# Altium PCB piccolaPCB.PcbDoc
Units mil, origin at the board's own origin, x right, y up, seen from the top; angles counter-clockwise.
Board outline 3149.61 x 3149.61 mil, 2 copper layers (Top Layer, Bottom Layer); 20 components, 48 nets, 176 pads, 8 vias.
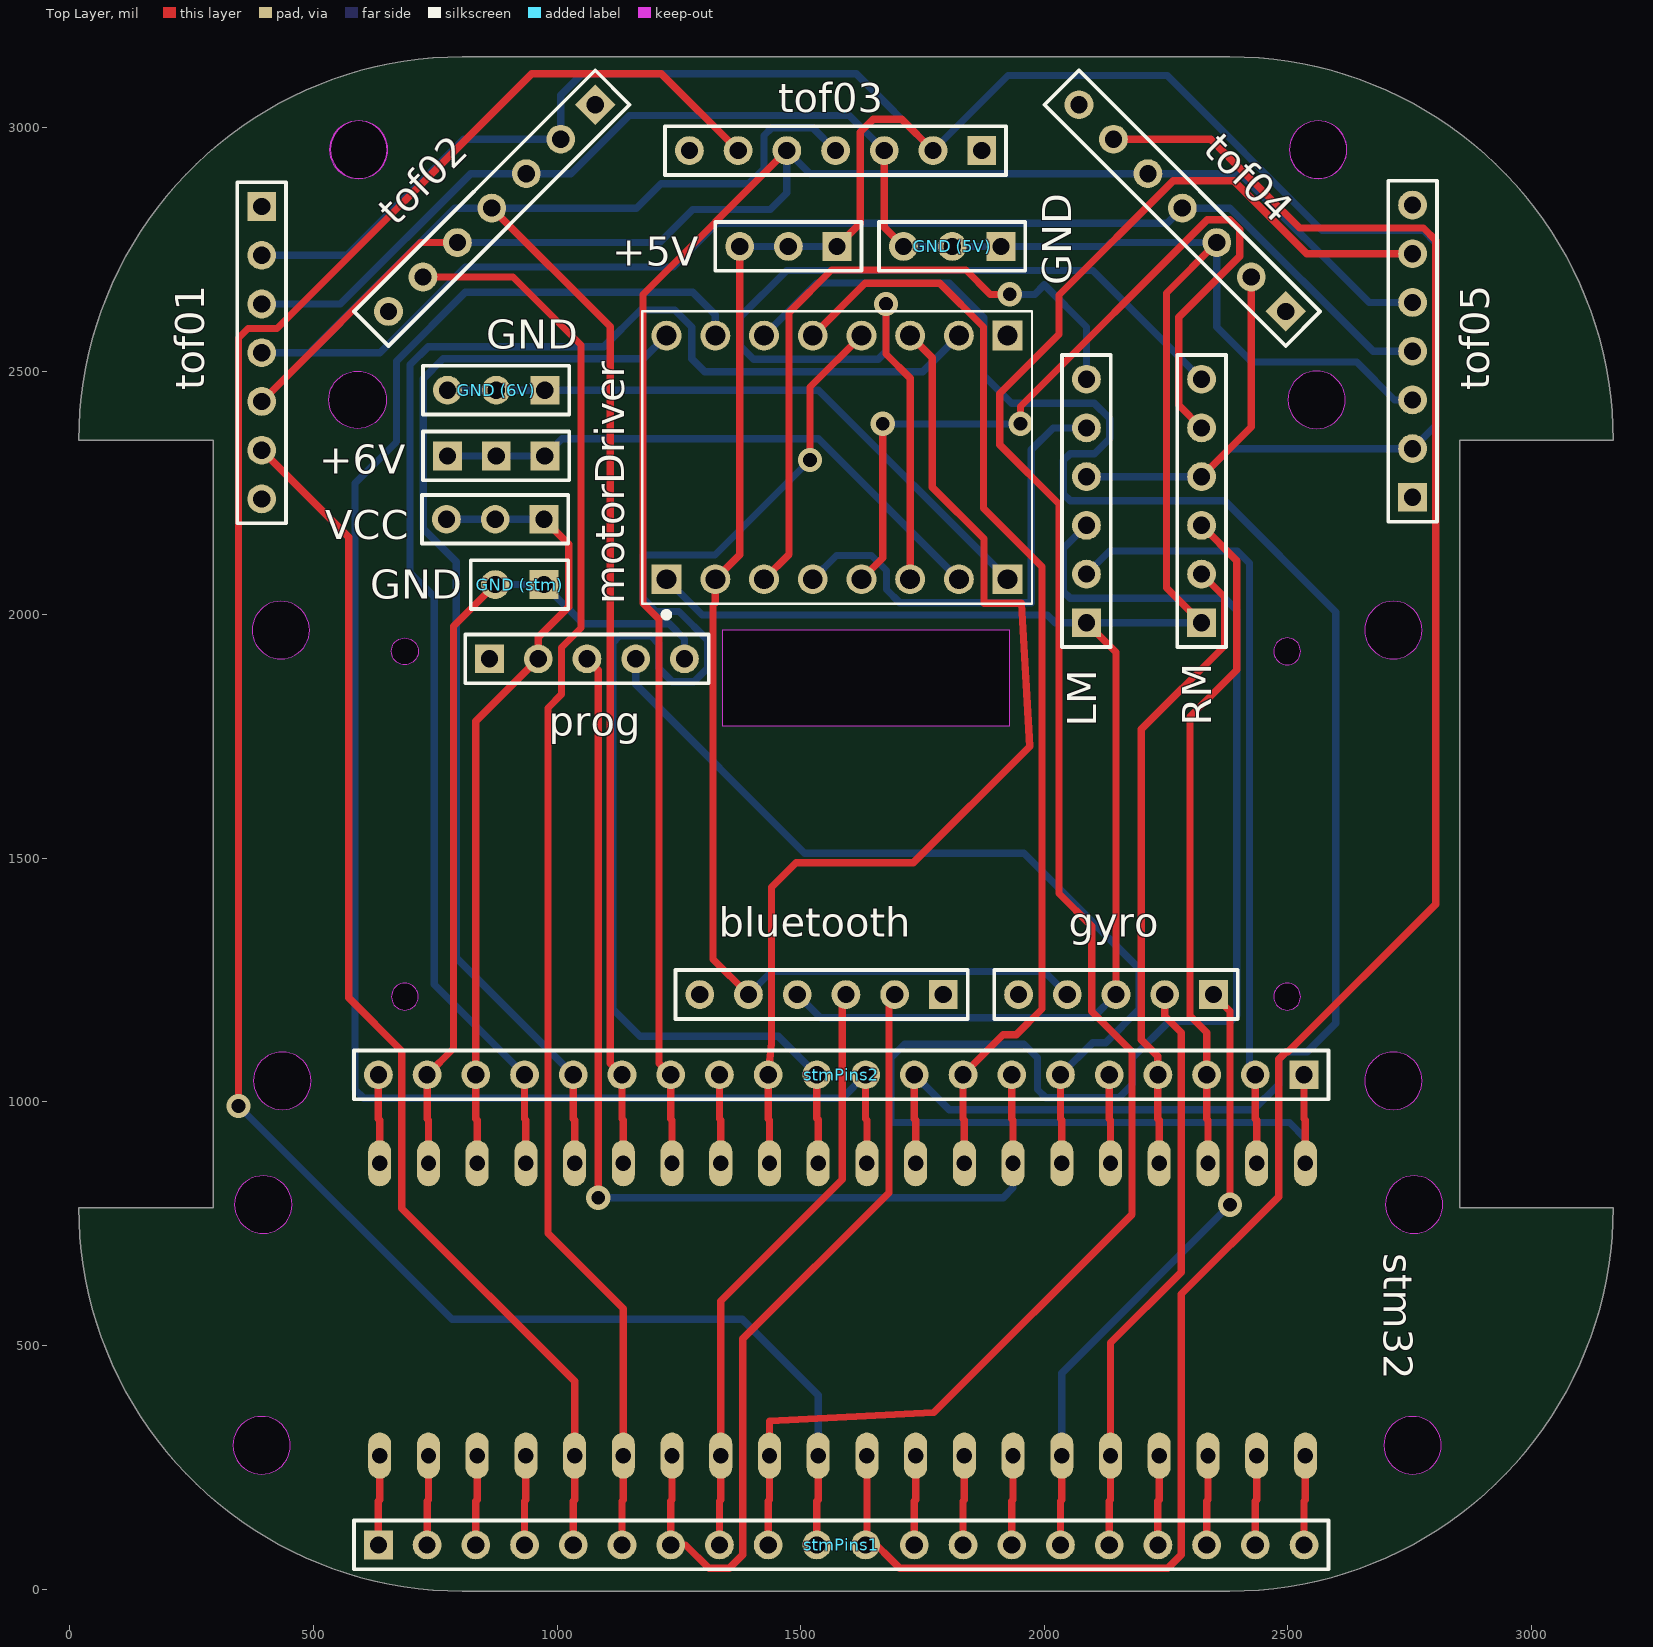
[diagram p0: Top Layer view]
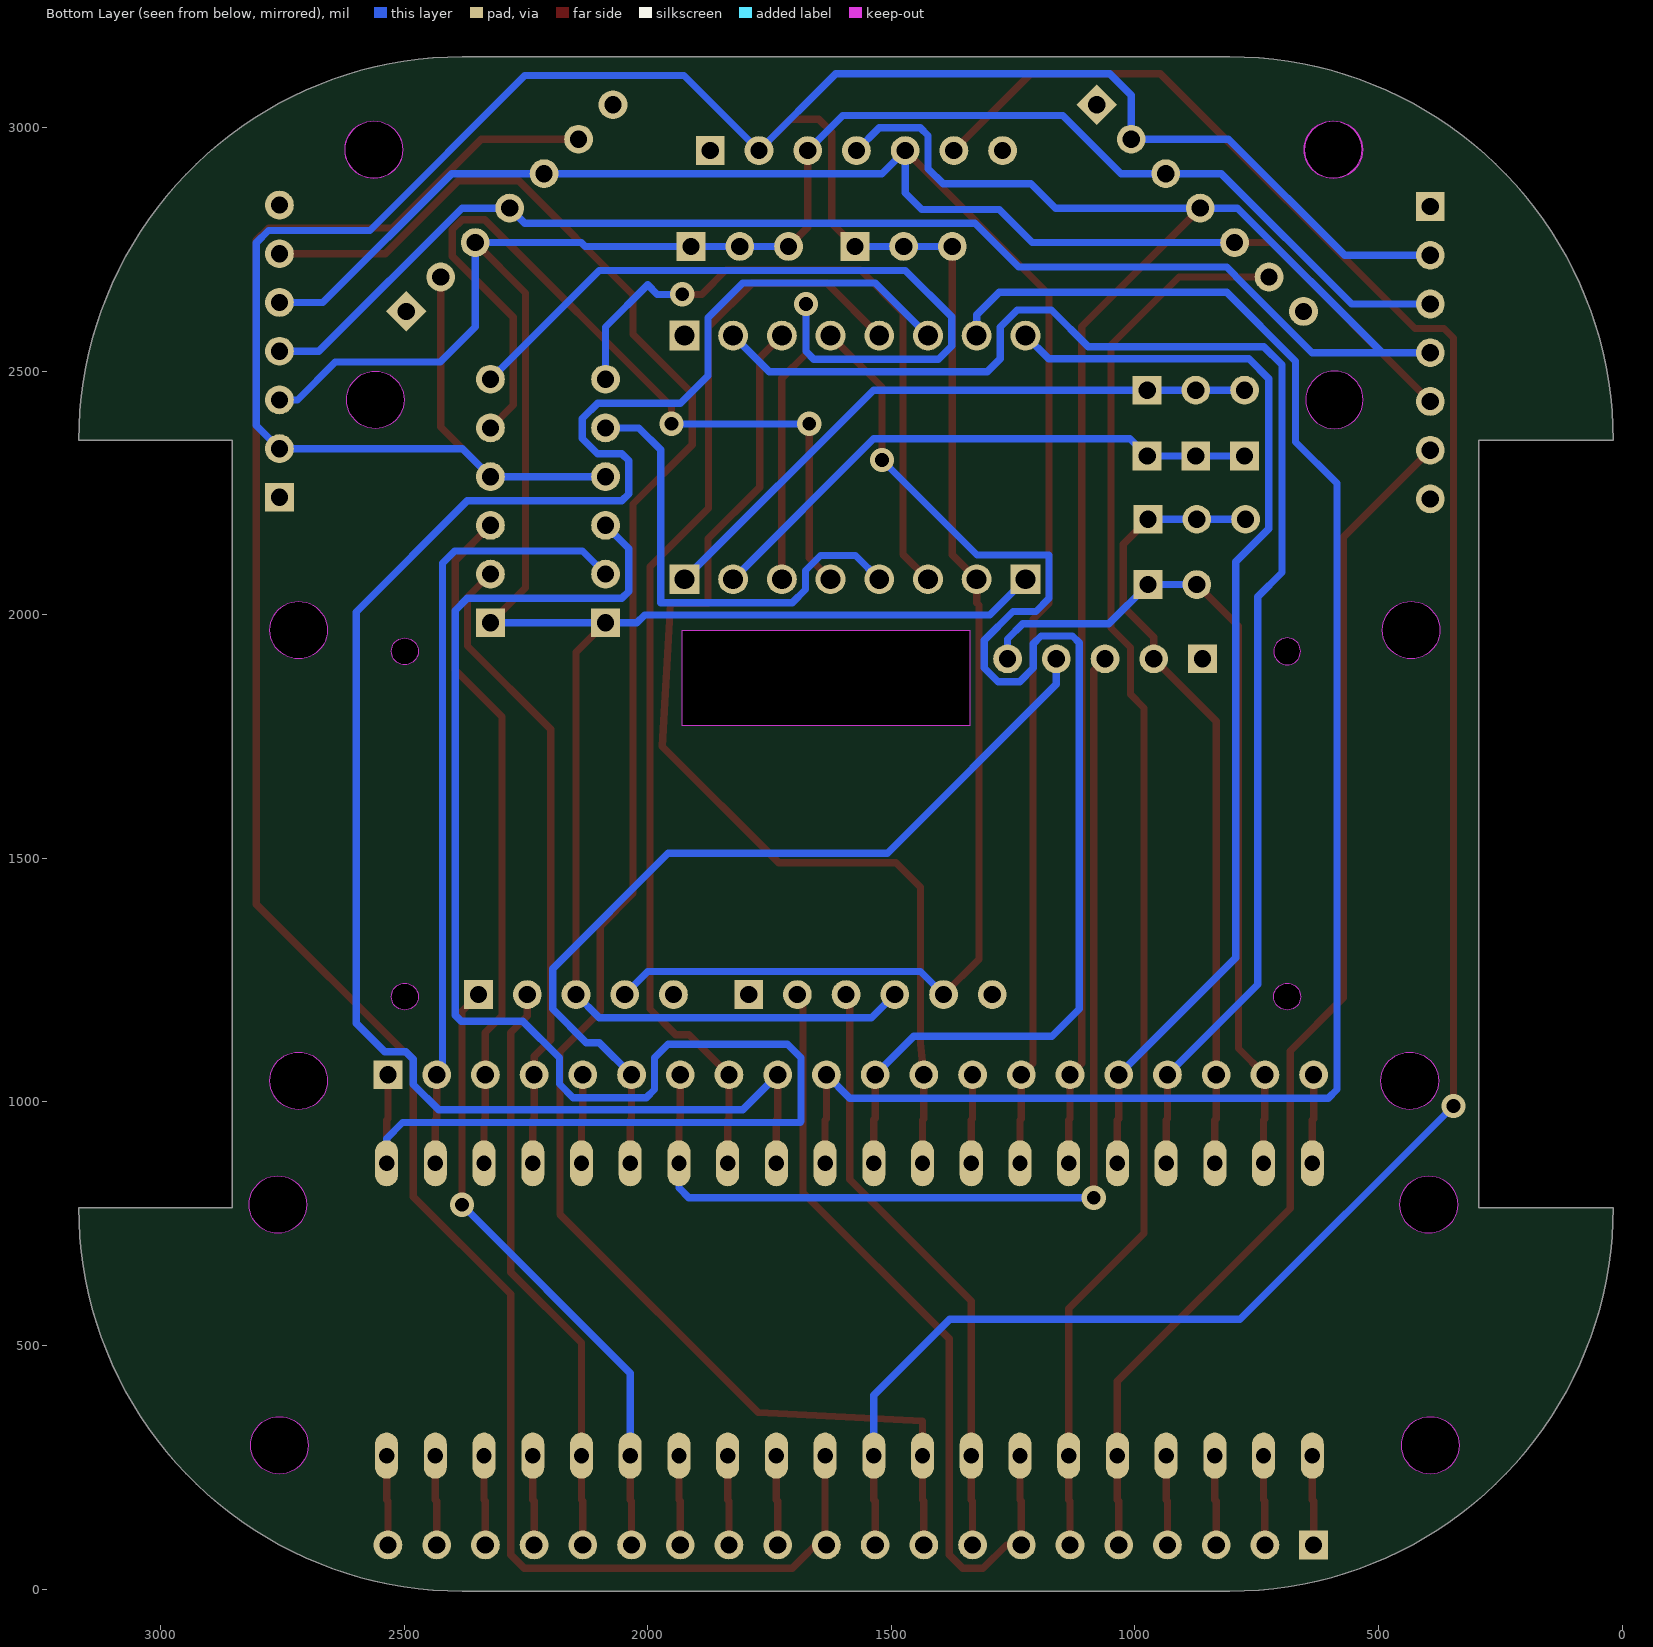
[diagram p1: Bottom Layer view, seen from below]

## Layer stack, top to bottom
Top Solder: solder mask 0.4, Solder Resist, Dk 3.5
Top Layer: signal copper 1.4
Dielectric 1: dielectric 12.6, FR-4, Dk 4.8
Bottom Layer: signal copper 1.4
Bottom Solder: solder mask 0.4, Solder Resist, Dk 3.5

## Board outline
18.27,783.07 293.86,783.07 293.86,2357.87 18.27,2357.87 cw(c805.67,2357.87) 805.67,3145.28 2380.47,3145.28 cw(c2380.47,2357.87) 3167.87,2357.87 2852.91,2357.87 2852.91,783.07 3167.87,783.07 cw(c2380.47,783.07) 2380.47,-4.33 805.67,-4.33 cw(c805.67,783.07)
cut-out: 1929.13,1968.5 1338.58,1968.5 1338.58,1771.65 1929.13,1771.65
cut-out: 660,1216.14 ccw(c687.56,1216.14) 687.56,1188.58 ccw(c687.56,1216.14) 715.12,1216.14 ccw(c687.56,1216.14) 687.56,1243.7 ccw(c687.56,1216.14)
cut-out: 2471.02,1216.14 ccw(c2498.58,1216.14) 2498.58,1188.58 ccw(c2498.58,1216.14) 2526.14,1216.14 ccw(c2498.58,1216.14) 2498.58,1243.7 ccw(c2498.58,1216.14)
cut-out: 2471.02,1924.8 ccw(c2498.58,1924.8) 2498.58,1897.24 ccw(c2498.58,1924.8) 2526.14,1924.8 ccw(c2498.58,1924.8) 2498.58,1952.36 ccw(c2498.58,1924.8)
cut-out: 687.56,1897.24 cw(c687.56,1924.8) 660,1924.8 cw(c687.56,1924.8) 687.56,1952.36 cw(c687.56,1924.8) 715.12,1924.8 cw(c687.56,1924.8)
cut-out: 590.55,2381.89 cw(c590.55,2440.94) 531.5,2440.94 cw(c590.55,2440.94) 590.55,2500 cw(c590.55,2440.94) 649.61,2440.94 cw(c590.55,2440.94)
cut-out: 396.97,730.32 ccw(c396.97,789.37) 456.02,789.37 ccw(c396.97,789.37) 396.97,848.43 ccw(c396.97,789.37) 337.91,789.37 ccw(c396.97,789.37)
cut-out: 2500,2440.94 ccw(c2559.06,2440.94) 2559.06,2381.89 ccw(c2559.06,2440.94) 2618.11,2440.94 ccw(c2559.06,2440.94) 2559.06,2500 ccw(c2559.06,2440.94)
cut-out: 2700.12,789.37 ccw(c2759.17,789.37) 2759.17,730.32 ccw(c2759.17,789.37) 2818.23,789.37 ccw(c2759.17,789.37) 2759.17,848.43 ccw(c2759.17,789.37)
cut-out: 534.76,2954.72 ccw(c593.82,2954.72) 593.82,2895.67 ccw(c593.82,2954.72) 652.87,2954.72 ccw(c593.82,2954.72) 593.82,3013.78 ccw(c593.82,2954.72)
cut-out: 2503.27,2954.72 ccw(c2562.32,2954.72) 2562.32,2895.67 ccw(c2562.32,2954.72) 2621.38,2954.72 ccw(c2562.32,2954.72) 2562.32,3013.78 ccw(c2562.32,2954.72)
cut-out: 435.98,984.25 ccw(c435.98,1043.31) 495.03,1043.31 ccw(c435.98,1043.31) 435.98,1102.36 ccw(c435.98,1043.31) 376.92,1043.31 ccw(c435.98,1043.31)
cut-out: 2716.54,984.25 ccw(c2716.54,1043.31) 2775.59,1043.31 ccw(c2716.54,1043.31) 2716.54,1102.36 ccw(c2716.54,1043.31) 2657.48,1043.31 ccw(c2716.54,1043.31)
cut-out: 2561.97,2895.32 ccw(c2561.97,2954.37) 2621.02,2954.37 ccw(c2561.97,2954.37) 2561.97,3013.43 ccw(c2561.97,2954.37) 2502.91,2954.37 ccw(c2561.97,2954.37)
cut-out: 591.97,2895.32 ccw(c591.97,2954.37) 651.02,2954.37 ccw(c591.97,2954.37) 591.97,3013.43 ccw(c591.97,2954.37) 532.91,2954.37 ccw(c591.97,2954.37)
cut-out: 2696.85,295.28 ccw(c2755.91,295.28) 2755.91,236.22 ccw(c2755.91,295.28) 2814.96,295.28 ccw(c2755.91,295.28) 2755.91,354.33 ccw(c2755.91,295.28)
cut-out: 334.65,295.28 ccw(c393.7,295.28) 393.7,236.22 ccw(c393.7,295.28) 452.76,295.28 ccw(c393.7,295.28) 393.7,354.33 ccw(c393.7,295.28)
cut-out: 2657.48,1968.5 ccw(c2716.54,1968.5) 2716.54,1909.45 ccw(c2716.54,1968.5) 2775.59,1968.5 ccw(c2716.54,1968.5) 2716.54,2027.56 ccw(c2716.54,1968.5)
cut-out: 374.02,1968.5 ccw(c433.07,1968.5) 433.07,1909.45 ccw(c433.07,1968.5) 492.13,1968.5 ccw(c433.07,1968.5) 433.07,2027.56 ccw(c433.07,1968.5)

## Design rules (kind name [scope] priority, off if disabled: settings)
Clearance [All] p1: gap=10 ignorepadtopadclearanceinfootprint=FALSE except(0: Arc-Hole Track-Hole SMDPad-Hole THPad-Hole Via-Hole Fill-Hole Poly-Hole Region-Hole Text-Hole)
PolygonConnect [All] p1: connectstyle=Relief reliefconductorwidth=10 reliefentries=4 polygonreliefangle="90 Angle" airgapwidth=10
RoutingVias [All] p1: holewidth=28 width=50 viastyle="Through Hole" minholewidth=28 minwidth=50 maxholewidth=28 maxwidth=50
SolderMaskExpansion [All] p1: expansion=4
Width [All] p1: maxlimit=30 minlimit=15 preferedwidth=15
30 further rules are at their usual default settings.

## Components (designator, comment, footprint, x,y, rotation, side; value= is the part's Value field where it differs from the comment)
+5V "Header 3" HDR1X3#1 1574.8,2755.91 r180 top
+6V "Header 3" HDR1X3#2 975,2326 r180 top
bluetooth "Header 6" HDR1X6 1792.91,1220.47 r180 top
"GND (5V)" "Header 3" HDR1X3#1 1911.02,2755.91 r180 top
"GND (6V)" "Header 3" HDR1X3#1 975,2461 r180 top
"GND (stm)" "Header 2" HDR1X2 973,2062 r180 top
gyro "Header 5" HDR1X5 2347.24,1220.47 r180 top
LM "Header 6" HDR1X6 2086.62,1983.46 r90 top
motorDriver "POLOLU-713" *SHIELD_POLOLU-713 1574.8,2322.83 r90 top
prog "Header 5" HDR1X5 861.42,1909.45 r0 top
RM "Header 6" HDR1X6 2322.84,1983.46 r90 top
stm32 "" BLUE_PILL 1936,574 r270 top
stmPins1 "Header 20" HDR1X20 633.27,90.67 r0 top
stmPins2 "Header 20" HDR1X20 2533.27,1055.67 r180 top
tof01 "Header 7" HDR1X7 393.7,2837.8 r270 top
tof02 "Header 7" HDR1X7 1078.27,3046.78 r225 top
tof03 "Header 7" HDR1X7 1871.65,2952.76 r180 top
tof04 "Header 7" HDR1X7 2495.6,2622.51 r135 top
tof05 "Header 7" HDR1X7 2755.91,2240.94 r90 top
VCC "Header 3" HDR1X3#1 973,2196 r180 top

## Footprints (in the part's own frame and the unit in brackets; to place one, negate y for a bottom-side part, rotate by r counter-clockwise, add the part's x,y. Pads: shape width x height; smd on the part's side, far side on the other; paste and mask are expansions set on the pad)
*SHIELD_POLOLU-713 [mm]
  rect 1.56x1.56 hole 1.04: 1(-6.35,8.89) 8(-6.35,-8.89) 9(6.35,-8.89)
  round 1.56 hole 1.04: 2(-6.35,6.35) 3(-6.35,3.81) 4(-6.35,1.27) 5(-6.35,-1.27) 6(-6.35,-3.81) 7(-6.35,-6.35) 10(6.35,-6.35) 11(6.35,-3.81) 12(6.35,-1.27) 13(6.35,1.27) 14(6.35,3.81) 15(6.35,6.35) 16(6.35,8.89)
  silkscreen extent -8.35,-10.16 7.62,10.16
BLUE_PILL [mil]
  oval 94.5x47.25 hole 31.5: P$1(-300,600) P$2(-300,500) P$3(-300,400) P$4(-300,300) P$5(-300,200) P$6(-300,100) P$7(-300,0) P$8(-300,-100) P$9(-300,-200) P$10(-300,-300) P$11(-300,-400) P$12(-300,-500) P$13(-300,-600) P$14(-300,-700) P$15(-300,-800) P$16(-300,-900) P$17(-300,-1000) P$18(-300,-1100) P$19(-300,-1200) P$20(-300,-1300) P$21(300,600) P$22(300,500) P$23(300,400) P$24(300,300) P$25(300,200) P$26(300,100) P$27(300,0) P$28(300,-100) P$29(300,-200) P$30(300,-300) P$31(300,-400) P$32(300,-500) P$33(300,-600) P$34(300,-700) P$35(300,-800) P$36(300,-900) P$37(300,-1000) P$38(300,-1100) P$39(300,-1200) P$40(300,-1300)
HDR1X2 [mm] "Connector; Header; 2 Position"
  rect 1.5x1.5 hole 0.9: 1(0,0)
  round 1.5 hole 0.9: 2(2.54,0)
  silkscreen extent -1.27,-1.27 3.81,1.27
HDR1X3#1 [mm] "Connector; Header; 3 Position"
  rect 1.5x1.5 hole 0.9: 1(0,0)
  round 1.5 hole 0.9: 2(2.54,0) 3(5.08,0)
  silkscreen extent -1.27,-1.27 6.35,1.27
HDR1X3#2 [mm] "Connector; Header; 3 Position"
  rect 1.5x1.5 hole 0.9: 1(0,0) 2(2.54,0) 3(5.08,0)
  silkscreen extent -1.27,-1.27 6.35,1.27
HDR1X5 [mm] "Connector; Header; 5 Position"
  rect 1.5x1.5 hole 0.9: 1(0,0)
  round 1.5 hole 0.9: 2(2.54,0) 3(5.08,0) 4(7.62,0) 5(10.16,0)
  silkscreen extent -1.27,-1.27 11.43,1.27
HDR1X6 [mm] "Connector; Header; 6 Position"
  rect 1.5x1.5 hole 0.9: 1(0,0)
  round 1.5 hole 0.9: 2(2.54,0) 3(5.08,0) 4(7.62,0) 5(10.16,0) 6(12.7,0)
  silkscreen extent -1.27,-1.27 13.97,1.27
HDR1X7 [mm] "Connector; Header; 7 Position"
  rect 1.5x1.5 hole 0.9: 1(0,0)
  round 1.5 hole 0.9: 2(2.54,0) 3(5.08,0) 4(7.62,0) 5(10.16,0) 6(12.7,0) 7(15.24,0)
  silkscreen extent -1.27,-1.27 16.51,1.27
HDR1X20 [mm] "Connector; Header; 20 Position"
  rect 1.5x1.5 hole 0.9: 1(0,0)
  round 1.5 hole 0.9: 2(2.54,0) 3(5.08,0) 4(7.62,0) 5(10.16,0) 6(12.7,0) 7(15.24,0) 8(17.78,0) 9(20.32,0) 10(22.86,0) 11(25.4,0) 12(27.94,0) 13(30.48,0) 14(33.02,0) 15(35.56,0) 16(38.1,0) 17(40.64,0) 18(43.18,0) 19(45.72,0) 20(48.26,0)
  silkscreen extent -1.27,-1.27 49.53,1.27

## Part data
+5V +6V "GND (5V)" "GND (6V)" VCC: "Header, 3-Pin", LatestRevisionDate=17-Jul-2002, LatestRevisionNote="Re-released for DXP Platform.", Publisher="Altium Limited"
bluetooth LM RM: "Header, 6-Pin", LatestRevisionDate=17-Jul-2002, LatestRevisionNote="Re-released for DXP Platform.", Publisher="Altium Limited"
"GND (stm)": "Header, 2-Pin", LatestRevisionDate=17-Jul-2002, LatestRevisionNote="Re-released for DXP Platform.", Publisher="Altium Limited"
gyro prog: "Header, 5-Pin", LatestRevisionDate=17-Jul-2002, LatestRevisionNote="Re-released for DXP Platform.", Publisher="Altium Limited"
motorDriver: "DC-motor driver; IC: TB6612FNG; 100kHz; 1A; Uin mot: 4.5", Package=None, Availability=Unavailable, MF=Pololu, MP=POLOLU-713, Price=None, SnapEDA_Link=https://www.snapeda.com/parts/POLOLU-713/Pololu/view-part/?ref=snap
stm32: library part BLUE_PILL
stmPins1 stmPins2: "Header, 20-Pin", LatestRevisionDate=17-Jul-2002, LatestRevisionNote="Re-released for DXP Platform.", Publisher="Altium Limited"
tof01 tof02 tof03 tof04 tof05: "Header, 7-Pin", LatestRevisionDate=17-Jul-2002, LatestRevisionNote="Re-released for DXP Platform.", Publisher="Altium Limited"

## Via types
v1: diameter 50, hole 28, Top Layer to Bottom Layer, 8 vias

## Nets (pads, with @x,y where several pads share a name; then routed paths per layer and width w, separated by ;. In a path a pad name is that pad's centre, name@x,y a point inside that pad or via, vN(x,y) a via of type N, cw(c..) or ccw(c..) an arc to the next point about the centre after c; other vN are vias at no path point)
GND: "GND (5V).1" "GND (5V).2" "GND (5V).3" bluetooth.4 gyro.3 LM.1 motorDriver.1 RM.1 tof01.3 tof02.3 tof03.3 tof04.3 tof05.3 | length 6434.9
  Top Layer w15: tof03.3 1671.65,2795.28 1711.02,2755.91 ; LM.1 2147.24,1922.84 gyro.3 ; RM.1 2250.81,2055.49 2250.81,2660.56 tof04.3
  Bottom Layer w15: tof01.3 555.1,2637.8 822.66,2905.36 tof02.3 1028.69,2905.36 1148.11,3024.78 1599.63,3024.78 tof03.3 ; motorDriver.1 1298.01,1999.63 2006.11,1999.63 2022.27,1983.47 LM.1 RM.1 ; bluetooth.4 1540.72,1172.67 2099.44,1172.67 gyro.3 ; 1711.02,2755.91 1811.02,2755.91 1911.02,2755.91 2128.27,2755.91 2136.3,2763.94 tof04.3 2354.18,2590.67 2426.18,2518.67 2641.27,2518.67 2718.99,2440.95 tof05.3
Net+6V_1: +6V.1 +6V.2 +6V.3 motorDriver.7 | length 1183.7
  Bottom Layer w15: +6V.3 +6V.2 +6V.1 1010.02,2361.02 1536.62,2361.02 motorDriver.7
Netbluetooth_2: bluetooth.2 stm32.P$34 stmPins1.7 | length 1642.8
  Top Layer w15: stm32.P$34 1236,183.4 1233.27,180.67 stmPins1.7 1263.77,90.67 1311.77,42.67 1353.27,42.67 1381.27,70.67 1381.27,513.67 1681.27,813.67 1681.27,1208.83 bluetooth.2
Netbluetooth_3: bluetooth.3 stm32.P$33 stmPins1.8 | length 1241.8
  Top Layer w15: stmPins1.8 1333.27,180.67 1336,183.4 stm32.P$33 1336,591.4 1585.27,840.67 1585.27,1220.47 bluetooth.3
"NetGND (6V)_1": "GND (6V).1" "GND (6V).2" "GND (6V).3" motorDriver.8 | length 1310.6
  Bottom Layer w15: 775,2461 875,2461 975,2461 1536.64,2461 motorDriver.8
"NetGND (stm)_1": "GND (stm).1" "GND (stm).2" prog.5 stm32.P$19 stmPins2.19 | length 1722.4
  Top Layer w15: stm32.P$19 736,962.67 733.27,965.4 stmPins2.19 787.4,1109.8 787.4,1976.4 873,2062
  Bottom Layer w15: 873,2062 973,2062 1053.52,1981.48 1230.03,1981.48 1261.42,1950.09 prog.5
Netgyro_1: gyro.1 stm32.P$26 stmPins1.15 | length 1288
  Top Layer w15: stmPins1.15 2033.27,180.67 2036,183.4 stm32.P$26 ; gyro.1 2381.27,1186.45 v1(2381.27,788.67)
  Bottom Layer w15: stm32.P$26 2036,443.4 v1(2381.27,788.67)
Netgyro_2: gyro.2 stm32.P$25 stmPins1.16 | length 1205.2
  Top Layer w15: stmPins1.16 2133.27,180.67 2136,183.4 stm32.P$25 2136,505.4 2281.27,650.67 2281.27,1142.39 2247.24,1176.42 gyro.2
NetLM_2: LM.2 stm32.P$2 stmPins2.2 | length 1602.3
  Top Layer w15: stmPins2.2 2433.27,965.4 2436,962.67 stm32.P$2
  Bottom Layer w15: LM.2 2133.82,2130.67 2396.27,2130.67 2421.26,2105.68 2421.26,1067.68 stmPins2.2
NetLM_3: LM.3 stm32.P$1 stmPins2.1 | length 3495
  Top Layer w15: stmPins2.1 2533.27,965.4 2536,962.67 stm32.P$1
  Bottom Layer w15: LM.3 2039.27,2136.12 2039.27,2047.67 2053.27,2033.67 2370.27,2033.67 2395.27,2008.67 2395.27,1178.17 2382.77,1165.67 2256.27,1165.67 2181.27,1090.67 2181.27,1036.64 2153.27,1008.64 2003.27,1008.64 1986.24,1025.67 1986.24,1090.67 1958.24,1118.67 1713.27,1118.67 1685.27,1090.67 1685.27,959.67 1687.27,957.67 2503.27,957.67 2536,924.94 stm32.P$1
NetLM_5: LM.5 motorDriver.4 | length 977.5
  Bottom Layer w15: motorDriver.4 1573.64,2121.67 1645.27,2121.67 1676.27,2090.67 1676.27,2051.63 1703.27,2024.63 1973.27,2024.63 1973.27,2338.36 2018.37,2383.47 LM.5
NetLM_6: LM.6 motorDriver.3 | length 1387.5
  Top Layer w15: motorDriver.3 1476.27,2124.3 1476.27,2620.67 1563.27,2707.67 1839.27,2707.67 1889.46,2657.47 v1(1929.13,2657.47)
  Bottom Layer w15: v1(1929.13,2657.47) 1980.43,2657.47 2000.12,2677.17 2086.61,2590.67 LM.6
NetmotorDriver_5: motorDriver.5 RM.5 | length 1751.5
  Top Layer w15: motorDriver.5 1668.27,2116.3 v1(1668.27,2391.67) ; v1(1951.27,2391.67) 1951.27,2427.53 2334.7,2810.96 2380.91,2810.96 2401.21,2790.67 2401.21,2736.05 2275.81,2610.65 2275.81,2430.49 RM.5
  Bottom Layer w15: v1(1668.27,2391.67) v1(1951.27,2391.67)
NetmotorDriver_6: motorDriver.6 RM.6 | length 2137.6
  Top Layer w15: v1(1675.27,2637.67) 1675.27,2535.21 1724.8,2485.68 motorDriver.6
  Bottom Layer w15: v1(1675.27,2637.67) 1675.27,2540.67 1659.22,2524.63 1403.27,2524.63 1376.27,2551.63 1376.27,2611.67 1471.27,2706.67 2099.63,2706.67 RM.6
NetmotorDriver_10: motorDriver.10 stm32.P$17 stmPins2.17 | length 3032.1
  Top Layer w15: stmPins2.17 933.27,965.4 936,962.67 stm32.P$17
  Bottom Layer w15: stmPins2.17 748.03,1240.91 748.03,2036.91 698.27,2086.67 698.27,2512.98 735.46,2550.17 1095.77,2550.17 1171.27,2625.67 1241.27,2625.67 1276.27,2590.67 1276.27,2525.67 1303.27,2498.67 1750.64,2498.67 motorDriver.10
NetmotorDriver_11: motorDriver.11 stm32.P$12 stmPins2.12 | length 2201.3
  Top Layer w15: stm32.P$12 1436,962.67 1433.27,965.4 stmPins2.12 1440.27,1120.67 1440.27,1440.67 1490.27,1490.67 1731.27,1490.67 1970.27,1729.67 1953.27,2023.67 1876.27,2023.67 1876.27,2155.67 1770.27,2261.67 1770.27,2527.37 motorDriver.11
NetmotorDriver_12: motorDriver.12 stm32.P$11 stmPins2.11 | length 2727.5
  Top Layer w15: v1(1519.27,2317.67) 1519.27,2467.3 motorDriver.12 ; stmPins2.11 1533.27,966.77 1536,964.04 stm32.P$11
  Bottom Layer w15: v1(1519.27,2317.67) 1324.27,2122.67 1176.27,2122.67 1176.27,2033.67 1203.27,2006.67 1250.27,2006.67 1309.27,1947.67 1309.27,1890.67 1281.02,1862.42 1236.52,1862.42 1208.45,1890.49 1208.45,1940.67 1192.64,1956.48 1128.27,1956.48 1114.39,1942.6 1114.39,1190.67 1170.39,1134.67 1454.27,1134.67 stmPins2.11
NetmotorDriver_13: motorDriver.13 stm32.P$8 stmPins2.8 | length 2282.4
  Top Layer w15: motorDriver.13 1632.14,2680.17 1785.77,2680.17 1875.27,2590.67 1875.27,2218.67 1995.27,2098.67 1995.27,1190.67 1942.27,1137.67 1915.27,1137.67 stmPins2.8 1833.27,965.4 1836,962.67 stm32.P$8
NetmotorDriver_14: motorDriver.14 stm32.P$9 stmPins2.9 | length 3848.3
  Top Layer w15: stmPins2.9 1733.27,965.4 1736,962.67 stm32.P$9
  Bottom Layer w15: motorDriver.14 1533.01,2681.05 1804.89,2681.05 1876.27,2609.67 1876.27,2490.67 1932.77,2434.17 2102.77,2434.17 2134.27,2402.67 2134.27,2361.67 2103.27,2330.67 2053.27,2330.67 2039.27,2316.67 2039.27,2247.67 2053.27,2233.67 2370.27,2233.67 2598.43,2005.51 2598.43,1161.42 2539.7,1102.7 2496.49,1102.7 2481.27,1087.47 2481.27,1035.67 2429.24,983.64 1805.3,983.64 stmPins2.9
NetmotorDriver_15: motorDriver.15 stm32.P$10 stmPins2.10 | length 3563
  Top Layer w15: stmPins2.10 1633.27,965.4 1636,962.67 stm32.P$10
  Bottom Layer w15: motorDriver.15 1324.8,2615.67 1278.8,2661.67 811.6,2661.67 670.27,2520.34 670.27,2354.67 585.27,2269.67 585.27,1025.67 603.27,1007.67 1585.27,1007.67 stmPins2.10
NetmotorDriver_16: motorDriver.16 stm32.P$16 stmPins2.16 | length 2275.3
  Top Layer w15: stmPins2.16 1033.27,965.4 1036,962.67 stm32.P$16
  Bottom Layer w15: stmPins2.16 793.27,1295.67 793.27,2108.67 725.27,2176.67 725.27,2484.49 765.95,2525.17 1177.14,2525.17 motorDriver.16
Netprog_2: prog.2 stm32.P$18 stmPins2.18 VCC.1 VCC.2 VCC.3 | length 1623.5
  Top Layer w15: stm32.P$18 836,962.67 833.27,965.4 stmPins2.18 833.27,1781.3 prog.2 961.42,1953.82 1024.27,2016.67 1024.27,2144.73 VCC.1
  Bottom Layer w15: VCC.3 VCC.2 VCC.1
Netprog_3: prog.3 stm32.P$7 stmPins2.7 | length 2208.8
  Top Layer w15: prog.3 1084.27,1886.6 v1(1084.27,803.4) ; stmPins2.7 1933.27,965.4 1936,962.67 stm32.P$7
  Bottom Layer w15: v1(1084.27,803.4) 1915.77,803.4 1936,823.63 stm32.P$7
Netprog_4: prog.4 stm32.P$6 stmPins2.6 | length 1811.5
  Top Layer w15: stmPins2.6 2033.27,965.4 2036,962.67 stm32.P$6
  Bottom Layer w15: prog.4 1161.42,1857.24 1507.99,1510.67 1958.27,1510.67 2195.27,1273.67 2195.27,1190.67 2126.27,1121.67 2099.27,1121.67 stmPins2.6
NetRM_2: RM.2 stm32.P$4 stmPins2.4 | length 1314.8
  Top Layer w15: stm32.P$4 2236,962.67 2233.27,965.4 stmPins2.4 2233.27,1093.7 2199.27,1127.7 2199.27,1765.08 2369.86,1935.67 2369.86,2036.44 RM.2
NetRM_3: RM.3 stm32.P$3 stmPins2.3 | length 1394.4
  Top Layer w15: RM.3 2395.27,2111.03 2395.27,1886.67 2299.27,1790.67 2299.27,1176.67 2333.27,1142.67 stmPins2.3 2333.27,965.4 2336,962.67 stm32.P$3
Netstm32_P$5: stm32.P$5 stmPins2.5 | length 182.8
  Top Layer w15: stmPins2.5 2133.27,965.4 2136,962.67 stm32.P$5
Netstm32_P$13: stm32.P$13 stmPins2.13 | length 182.8
  Top Layer w15: stmPins2.13 1333.27,965.4 1336,962.67 stm32.P$13
Netstm32_P$14: stm32.P$14 stmPins2.14 tof01.5 tof02.5 tof03.5 tof04.5 tof05.5 | length 4981.5
  Top Layer w15: tof01.5 719.84,2763.94 tof02.5 ; stm32.P$14 1236,962.67 1233.27,965.4 stmPins2.14 1209.27,1079.67 1209.27,1990.67 1176.27,2023.67 1176.27,2657.37 tof03.5
  Bottom Layer w15: tof02.5 1210.53,2763.94 1278.27,2831.67 1437.65,2831.67 1471.65,2865.67 tof03.5 1519.05,2905.36 tof04.5 2402.58,2905.36 2666.99,2640.95 tof05.5
Netstm32_P$15: stm32.P$15 stmPins2.15 tof01.4 tof02.4 tof03.4 tof04.4 tof05.4 | length 6009.2
  Top Layer w15: tof02.4 1109.27,2591.52 1109.27,1079.67 stmPins2.15 1133.27,965.4 1136,962.67 stm32.P$15
  Bottom Layer w15: tof01.4 492.6,2537.8 ; tof03.4 1524.63,2999.78 1440.77,2999.78 1424.63,2983.64 1424.63,2915.67 1393.63,2884.67 1213.27,2884.67 1163.24,2834.65 tof02.4 789.45,2834.65 492.6,2537.8 ; tof05.4 2674.97,2540.95 2381.27,2834.65 tof04.4 2252.49,2803.67 1328.27,2803.67 1238.27,2713.67 811.67,2713.67 776.27,2677.39 636.68,2537.8 492.6,2537.8
Netstm32_P$20: stm32.P$20 stmPins2.20 | length 182.8
  Top Layer w15: stmPins2.20 633.27,965.4 636,962.67 stm32.P$20
Netstm32_P$21: stm32.P$21 stmPins1.20 | length 184.5
  Top Layer w15: stmPins1.20 2533.27,180.67 2536,183.4 stm32.P$21
Netstm32_P$22: stm32.P$22 stmPins1.19 | length 184.5
  Top Layer w15: stmPins1.19 2433.27,180.67 2436,183.4 stm32.P$22
Netstm32_P$23: stm32.P$23 stmPins1.18 | length 184.5
  Top Layer w15: stmPins1.18 2333.27,180.67 2336,183.4 stm32.P$23
Netstm32_P$24: stm32.P$24 stmPins1.17 | length 184.5
  Top Layer w15: stmPins1.17 2233.27,180.67 2236,183.4 stm32.P$24
Netstm32_P$27: stm32.P$27 stmPins1.14 | length 184.5
  Top Layer w15: stmPins1.14 1933.27,180.67 1936,183.4 stm32.P$27
Netstm32_P$28: stm32.P$28 stmPins1.13 | length 184.5
  Top Layer w15: stmPins1.13 1833.27,180.67 1836,183.4 stm32.P$28
Netstm32_P$29: stm32.P$29 stmPins1.12 | length 184.5
  Top Layer w15: stmPins1.12 1733.27,180.67 1736,183.4 stm32.P$29
Netstm32_P$30: stm32.P$30 stmPins1.11 tof04.6 | length 4531.9
  Top Layer w15: stmPins1.11 stmPins1.11@1636,109.94 ; stm32.P$30 stmPins1.11@1636,109.94 ; tof04.6 2341.87,2976.07 2524.27,2793.67 2778.27,2793.67 2803.27,2768.67 2803.27,1405.63 2500.33,1102.7 2496.49,1102.7 2481.27,1087.47 2481.27,805.67 2281.27,605.67 2281.27,70.67 2253.27,42.67 1703.27,42.67 stmPins1.11@1636,109.94
Netstm32_P$31: stm32.P$31 stmPins1.10 tof03.6 | length 4635.6
  Top Layer w15: v1(346.27,991.67) 346.27,2568.17 365.77,2587.67 425.27,2587.67 947.83,3110.24 1214.17,3110.24 tof03.6 ; stmPins1.10 1533.27,180.67 1536,183.4 stm32.P$31
  Bottom Layer w15: v1(346.27,991.67) 784.27,553.67 1380,553.67 1536,397.67 stm32.P$31
Netstm32_P$32: stm32.P$32 stmPins1.9 tof05.6 | length 4103.2
  Top Layer w15: stmPins1.9 1433.27,180.67 1436,183.4 stm32.P$32 1436,345.13 1773,362.4 2180.3,769.7 2180.3,1102.67 2097.27,1185.7 2097.27,1360.67 2030.27,1427.67 2030.27,2227.17 1908.77,2348.67 1908.77,2453.97 2030.27,2575.47 2030.27,2656.36 2264.57,2890.67 2388.77,2890.67 2538.5,2740.95 tof05.6
Netstm32_P$35: stm32.P$35 stmPins1.6 tof02.6 | length 2938.7
  Top Layer w15: tof02.6 909.71,2693.23 1049.27,2553.67 1049.27,1972.67 1009.27,1932.67 1009.27,1836.67 981.27,1808.67 981.27,730.67 1136,575.94 stm32.P$35 1136,183.4 1133.27,180.67 stmPins1.6
Netstm32_P$36: stm32.P$36 stmPins1.5 tof01.6 | length 2514.3
  Top Layer w15: tof01.6 572.27,2159.23 572.27,1213.67 681.27,1104.67 681.27,781.4 1036,426.67 stm32.P$36 1036,183.4 1033.27,180.67 stmPins1.5
Netstm32_P$37: stm32.P$37 stmPins1.4 | length 184.5
  Top Layer w15: stmPins1.4 933.27,180.67 936,183.4 stm32.P$37
Netstm32_P$38: stm32.P$38 stmPins1.3 | length 184.5
  Top Layer w15: stmPins1.3 833.27,180.67 836,183.4 stm32.P$38
Netstm32_P$39: stm32.P$39 stmPins1.2 | length 184.5
  Top Layer w15: stmPins1.2 733.27,180.67 736,183.4 stm32.P$39
Netstm32_P$40: stm32.P$40 stmPins1.1 | length 184.5
  Top Layer w15: stmPins1.1 633.27,180.67 636,183.4 stm32.P$40
VCC: +5V.1 +5V.2 +5V.3 bluetooth.5 gyro.4 LM.4 motorDriver.2 RM.4 tof01.2 tof02.2 tof03.2 tof04.2 tof05.2 | length 7398.1
  Top Layer w15: +5V.3 1374.8,2122.84 motorDriver.2 1324.8,2024.67 1320.27,2020.13 1320.27,1293.12 bluetooth.5 ; +5V.1 1622.27,2803.37 1622.27,2990.67 1648.8,3017.2 1707.21,3017.2 tof03.2 ; RM.4 2424.89,2385.52 tof04.2
  Bottom Layer w15: tof01.2 569.53,2737.8 807.8,2976.07 tof02.2 1007.56,3065.97 1051.83,3110.24 1614.17,3110.24 tof03.2 1925.57,3106.67 2252.27,3106.67 2570.27,2788.67 2778.27,2788.67 2803.27,2763.67 2803.27,2388.31 tof05.2 2380.31,2340.95 RM.4 LM.4 ; +5V.3 +5V.2 +5V.1 ; bluetooth.5 1440.11,1267.67 2000.05,1267.67 gyro.4
pads on no net: bluetooth.1 bluetooth.6 gyro.5 motorDriver.9 prog.1 tof01.1 tof01.7 tof02.1 tof02.7 tof03.1 tof03.7 tof04.1 tof04.7 tof05.1 tof05.7

## Silkscreen, mask and mechanical layers (free items; w line width, h text height)
Top Overlay:
  text "GND" at 2055,2676 h60 r90
  text "GND" at 855,2546 h60
  text "GND" at 617,2033 h60
Mechanical 1:
  circle w0.5: c590.55,2440.94 r59.06
  circle w0.5: c2559.06,2440.94 r59.06
  circle w0.5: c2759.17,789.37 r59.06
  circle w0.5: c396.97,789.37 r59.06
  circle w0.5: c687.56,1924.8 r27.56
  circle w0.5: c687.56,1216.14 r27.56
  circle w0.5: c2498.58,1924.8 r27.56
  circle w0.5: c2498.58,1216.14 r27.56
  circle w0.5: c433.07,1043.31 r59.06
  circle w0.5: c2716.54,1043.31 r59.06
  circle w0.5: c2561.97,2954.37 r59.06
  circle w0.5: c591.97,2954.37 r59.06
  circle w0.5: c2755.91,295.28 r59.06
  circle w0.5: c393.7,295.28 r59.06
  circle w0.5: c2716.54,1968.5 r59.06
  circle w0.5: c433.07,1968.5 r59.06
  lines w0.5: 18.27,783.07 ccw(c805.67,783.07) 805.67,-4.33 2380.47,-4.33 ccw(c2380.47,783.07) 3167.87,783.07 2852.91,783.07 2852.91,2357.87 3167.87,2357.87 ccw(c2380.47,2357.87) 2380.47,3145.28 805.67,3145.28 ccw(c805.67,2357.87) 18.27,2357.87 293.86,2357.87 293.86,783.07 18.27,783.07